# EAGLE board stepper-motor-driver (EAGLE 5.02)
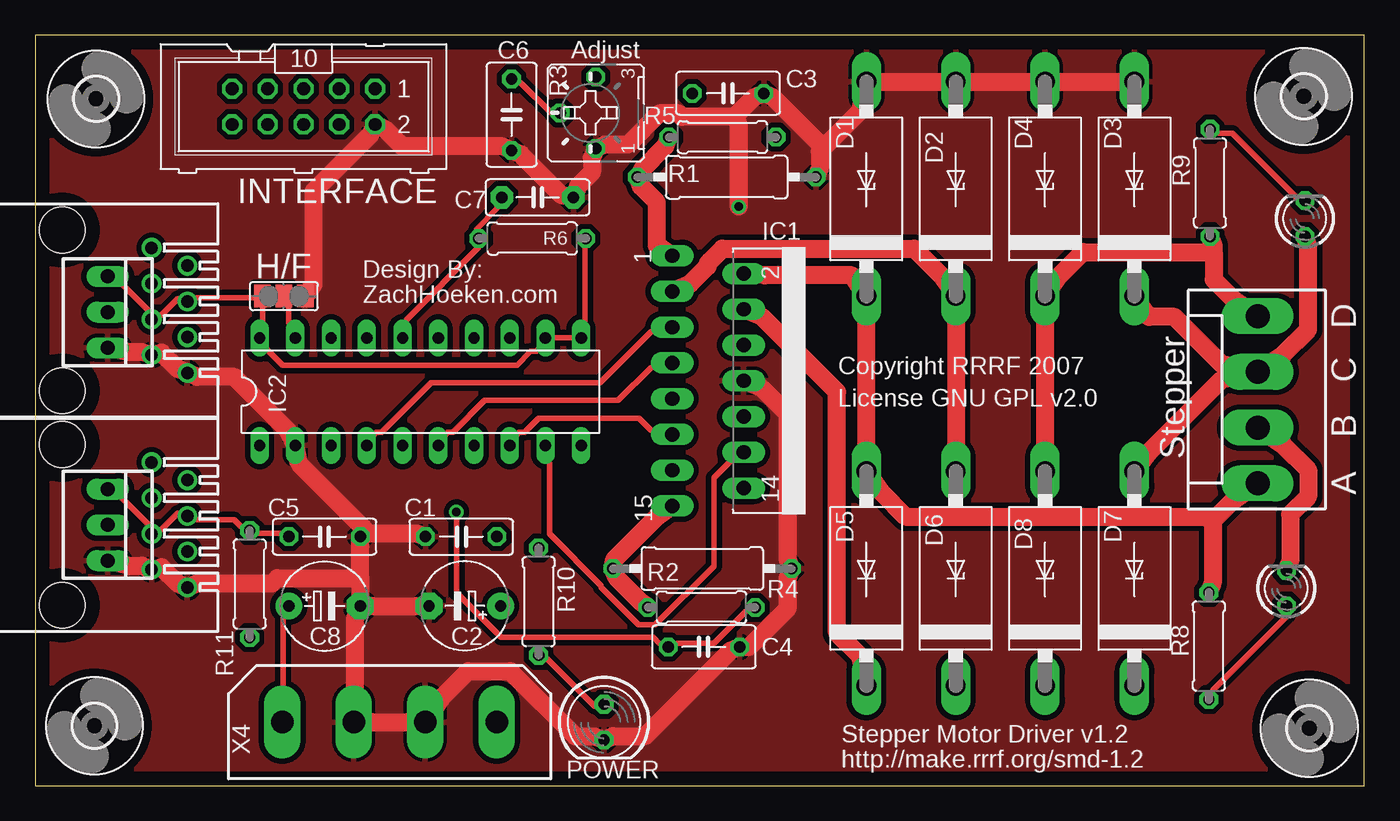
[diagram p0: board, top side]
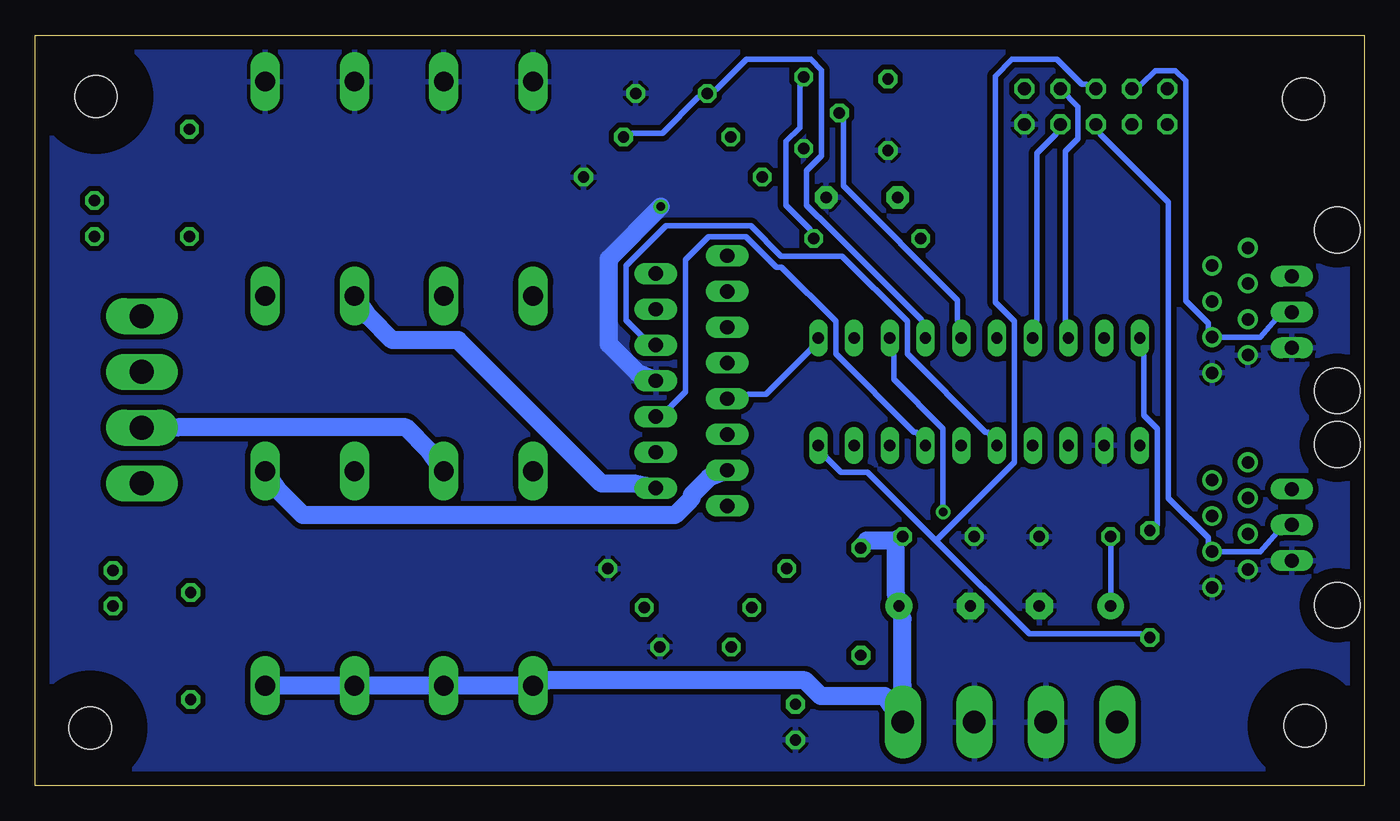
[diagram p1: board, bottom side, seen from below]

Size 94.48 x 53.33 mm. Coordinates in mm from the lower left corner, seen from the top.
Outline: 0,0 94.48,0 94.48,53.33 0,53.33 0,0
Copper layers (1*16): Top 0.035mm / dielectric 1.5mm / Bottom 0.035mm
Design rules "default": minimum track width 10mil, minimum drill 24mil, track to track 8mil, track to pad 8mil, pad to pad 8mil, via to via 8mil, smd to smd 8mil, copper to edge 40mil, drill to drill 8mil, minimum pad ring 10mil, minimum via ring 8mil, stop-mask expansion 4mil, vias tented up to drill 0mil, thermal gap 10mil
Net classes: 0 default: width 0.406 mm, clearance 0.381 mm; 1 Power: width 1.27 mm, clearance 0.381 mm; 2 Signal: width 0.406 mm, clearance 0.381 mm; 3 Ground: width 1.27 mm, clearance 0.381 mm

## Footprints (pad centres in the part's own frame; a part is rotated, then mirrored left to right if it is on the bottom)
C050-025X075 = drill 0.813 octagon: 1 -2.54,0; 2 2.54,0
E5-6 = drill 0.813 pad 1.905 round: + -2.54,0 | drill 0.813 pad 1.905 octagon: - 2.54,0
C050-030X075 = drill 0.813 octagon: 1 -2.54,0; 2 2.54,0
C050-035X075 = drill 0.813 octagon: 1 -2.54,0; 2 2.54,0
C5B2.5 = drill 0.813 pad 1.6 octagon: 1 -2.54,0; 2 2.54,0
CB429-15 = drill 1.397 long: A 7.62,0; C -7.62,0
3,0 = hole 3: 0,0
MULTIWATT-15 = drill 1.016 long: 1 -8.89,-7.62; 2 -7.62,-2.54; 3 -6.35,-7.62; 4 -5.08,-2.54; 5 -3.81,-7.62; 6 -2.54,-2.54; 7 -1.27,-7.62; 8 0,-2.54; 9 1.27,-7.62; 10 2.54,-2.54; 11 3.81,-7.62; 12 5.08,-2.54; 13 6.35,-7.62; 14 7.62,-2.54; 15 8.89,-7.62
DIL20 = drill 0.813 long: 1 -11.43,-3.81; 2 -8.89,-3.81; 3 -6.35,-3.81; 4 -3.81,-3.81; 5 -1.27,-3.81; 6 1.27,-3.81; 7 3.81,-3.81; 8 6.35,-3.81; 9 8.89,-3.81; 10 11.43,-3.81; 11 11.43,3.81; 12 8.89,3.81; 13 6.35,3.81; 14 3.81,3.81; 15 1.27,3.81; 16 -1.27,3.81; 17 -3.81,3.81; 18 -6.35,3.81; 19 -8.89,3.81; 20 -11.43,3.81
520426-4 = drill 0.889 round: 1 -4.445,6.35; 2 -3.175,8.89; 3 -1.905,6.35; 4 -0.635,8.89; 5 0.635,6.35; 6 1.905,8.89; 7 3.175,6.35; 8 4.445,8.89 | hole 3.251: -5.715,0; 5.715,0
LED5MM = drill 0.813 octagon: A -1.27,0; K 1.27,0
LED3MM = drill 0.813 octagon: A -1.27,0; K 1.27,0
0309/12 = drill 0.813 octagon: 1 -6.35,0; 2 6.35,0
B25P = drill 0.813 octagon: A -2.54,0; E 2.54,0; S 0,2.54
0207/7 = drill 0.813 octagon: 1 -3.81,0; 2 3.81,0
SJ_2 = smd 1.168 x 1.6: 1 -1.524,0; 2 0,0; 3 1.524,0
ML10 = drill 0.914 octagon: 1 -5.08,-1.27; 2 -5.08,1.27; 3 -2.54,-1.27; 4 -2.54,1.27; 5 0,-1.27; 6 0,1.27; 7 2.54,-1.27; 8 2.54,1.27; 9 5.08,-1.27; 10 5.08,1.27
KK-156-4 = drill 1.7 pad 2.184 long: 1 -5.94,0; 2 -1.98,0; 3 1.98,0; 4 5.94,0
22-23-2031 = drill 1 long: 1 -2.54,0; 2 0,0; 3 2.54,0
9090-4V = drill 1.6 pad 2.6 long: 1 -7.62,0; 2 -2.54,0; 3 2.54,0; 4 7.62,0

## Placement (x,y rotation side)
C1  100nf  [C050-025X075]  30.28,17.7 0 top
C2  100uF  [E5-6]  30.54,12.77 180 top
C3  1nF  [C050-030X075]  49.24,49.2 180 top
C4  1nF  [C050-030X075]  47.53,9.86 180 top
C5  100nf  [C050-025X075]  20.57,17.7 180 top
C6  100nf  [C050-035X075]  33.86,47.68 270 top
C7  3.3 nF  [C5B2.5]  35.71,41.81 0 top
C8  100uF  [E5-6]  20.57,12.77 0 top
D1  SB360  [CB429-15]  59.08,42.41 90 top
D2  SB360  [CB429-15]  65.43,42.41 90 top
D3  SB360  [CB429-15]  78.13,42.41 90 top
D4  SB360  [CB429-15]  71.78,42.41 90 top
D5  SB360  [CB429-15]  59.08,14.73 90 top
D6  SB360  [CB429-15]  65.43,14.73 90 top
D7  SB360  [CB429-15]  78.13,14.73 90 top
D8  SB360  [CB429-15]  71.78,14.73 90 top
H1  MOUNT-HOLE3.0  [3,0]  90.56,4.09 0 top
H2  MOUNT-HOLE3.0  [3,0]  90.16,48.98 0 top
H3  MOUNT-HOLE3.0  [3,0]  4.22,4.27 0 top
H4  MOUNT-HOLE3.0  [3,0]  4.33,48.8 0 top
IC1  L298  [MULTIWATT-15]  52.89,28.77 270 top
IC2  L297  [DIL20]  27.38,28 0 top
J1  [520426-4]  1.93,33.78 270 top
J2  [520426-4]  1.93,18.54 270 top
LED1  [LED5MM]  40.44,4.52 270 top
LED2  [LED3MM]  88.93,14.03 90 top
LED3  [LED3MM]  90.25,40.3 90 top
R1  0.5  [0309/12]  49.15,43.25 180 top
R2  0.5  [0309/12]  47.42,15.44 180 top
R3  10K  [B25P]  39.85,47.81 90 top
R4  4K7  [0207/7]  47.36,12.67 0 top
R5  4K7  [0207/7]  48.85,46.09 180 top
R6  22K  [0207/7]  35.33,38.89 0 top
R8  560  [0207/7]  83.42,9.93 270 top
R9  560  [0207/7]  83.5,42.84 270 top
R10  560  [0207/7]  35.78,13.08 90 top
R11  100K  [0207/7]  15.25,14.34 270 top
SJ1  [SJ_2]  17.68,34.79 0 top
SV1  [ML10]  19.07,48.25 180 top
X1  [KK-156-4]  86.89,27.43 90 top
X2  Minimum  [22-23-2031]  5.15,18.54 270 top
X3  Maximum  [22-23-2031]  5.15,33.65 270 top
X4  9090-4V  [9090-4V]  25.19,4.52 0 top

## Library data of the parts
C1-C6 C8 R1 R2 R4-R6 R8-R11 = rcl
C7 = capacitor-wima
D1-D8 = diode
H1-H4 = holes
IC1 IC2 = st-microelectronics
J1 J2 = con-amp
LED1-LED3 = led
R3 = pot
SJ1 = jumper
SV1 = con-harting-ml
X1-X3 = con-molex
X4 = con-thomas-betts

## Nets
DIR: IC2.17 SV1.4
ENABLE: IC2.10 R11.2 SV1.5
GND [Ground]: C1.1 C2.- C3.1 C4.1 C5.1 C6.2 C7.2 C8.- D1.A D2.A D3.A D4.A IC1.8 IC2.2 J1.7 J1.8 J2.7 J2.8 LED1.K R1.1 R2.1 R3.A SJ1.3 SV1.2 X2.3 X3.3 X4.2 X4.3
MAX: J1.6 SV1.7 X3.2
MIN: J2.6 SV1.6 X2.2
N$1: IC2.19 SJ1.2
N$2: LED3.K R9.1
N$3: LED2.A R8.2
N$4: LED1.A R10.1
N$25: IC1.5 IC2.4
N$26: IC1.7 IC2.6
N$27 [Power]: D4.C D8.A IC1.14 R9.2 X1.4
N$28 [Power]: D3.C D7.A IC1.13 LED3.A X1.3
N$29 [Power]: D2.C D6.A IC1.3 LED2.K X1.2
N$30 [Power]: D1.C D5.A IC1.2 R8.1 X1.1
N$31: IC1.10 IC2.7
N$32 [Power]: IC1.15 R2.2 R4.1
N$33 [Power]: IC1.1 R1.2 R5.2
N$34: IC1.12 IC2.9
N$36: C4.2 IC2.13 R4.2
N$37: C3.2 IC2.14 R5.1
ON_A: IC1.6 IC2.5
ON_B: IC1.11 IC2.8
OSC: C7.1 IC2.16 R6.1
STEP: IC2.18 SV1.3
SYNC: IC2.1
VCC: C5.2 C8.+ IC1.9 IC2.11 IC2.12 IC2.20 J1.4 J1.5 J2.4 J2.5 R3.E R6.2 R11.1 SJ1.1 X2.1 X3.1 X4.1
VREF: C6.1 IC2.15 R3.S
VSS [Power]: C1.2 C2.+ D5.C D6.C D7.C D8.C IC1.4 R10.2 X4.4

## Tracks (layer width: path | path; a pad name or v marks a point on that pad's centre or on a via)
DIR
  Bottom 0.406: IC2.17 23.29,33.12 23.29,44.93 21.92,46.3 SV1.4
ENABLE
  Bottom 0.406: 30.44,17.41 35.31,22.27 37.21,22.27 38.18,23.24 IC2.10 | 30.44,17.41 23.82,10.79 15.9,10.79 R11.2 | SV1.5 19.76,49.83 20.07,49.83 21.84,51.61 25.04,51.61 26.24,50.41 26.24,34.36 24.87,32.99 24.87,22.98 30.44,17.41
GND  (via drill 0.61)
  Top 1.27: SJ1.3 19.76,35.58 19.76,42.21 23.85,46.3 SV1.2 24.84,46.68 26.09,45.44 33.22,45.44 C6.2 34.52,44.88 37.46,41.93 C7.2 38.58,42.59 39.57,43.58 39.57,44.62 R3.A 40.49,45.56 42.14,45.56 44.35,47.77 45.74,47.77 46,47.52 49.71,47.52 | 56.02,45.32 58.65,47.95 D1.A D2.A D4.A D3.A | 56.02,45.32 55.78,45.08 55.78,43.89 R1.1 | 56.02,45.32 52.42,48.91 C3.1 51.13,48.94 49.71,47.52 | IC1.8 51.66,28.24 53.49,26.41 53.49,16.07 R2.1 53.49,14.78 53.49,12.62 50.72,9.85 C4.1 49.43,9.6 43.36,3.53 41.07,3.53 LED1.K 39.78,3.5 38.4,3.5 33.76,8.15 30.78,8.15 29.01,6.37 X4.3 26.44,4.52 23.93,4.52 X4.2 22.71,7.11 22.71,11.83 C8.- | X2.3 6.6,15.64 7.59,15.64 J2.7 8.97,15.54 10.13,14.37 J2.8 11.51,14.37 16.84,14.37 17.22,14.75 23.11,14.75 | X3.3 6.65,30.8 7.59,30.8 J1.7 8.97,30.78 10.13,29.61 J1.8 11.51,29.05 14.15,29.05 17.96,25.24 IC2.2 18.77,22.88 23.32,18.33 23.25,18.12 | 23.11,14.75 23.11,13.71 C8.- | 23.11,14.75 23.11,17.04 C5.1 23.25,18.12 | C1.1 27.1,17.93 23.85,17.93 23.25,18.12 | C2.- 27.05,12.77 24.05,12.77 C8.- | v50.01,41.14 50.01,46.96 49.71,47.52
  Bottom 1.27: v50.01,41.14 53.7,37.46 53.7,31.36 51.64,29.31 IC1.8
  pour Top: -1.88,55.88 97.18,55.88 97.18,-2.55 -1.88,-2.55
  pour Bottom: -1.88,55.88 97.18,55.88 97.18,-2.55 -1.88,-2.55
MAX
  Bottom 0.406: SV1.7 15.85,49.83 14.86,50.82 13.44,50.82 12.7,50.08 12.7,34.46 11.1,32.86 11.1,32.56 J1.6 7.39,31.87 5.87,33.65 X3.2
MIN
  Bottom 0.406: SV1.6 18.77,46.3 13.92,41.45 13.92,20.44 11.1,17.62 11.1,17.32 J2.6 10.82,16.5 10.44,16.63 7.39,16.63 5.74,18.54 X2.2
N$1
  Top 0.406: SJ1.2 18.03,34.01 18.03,32.94 IC2.19
N$2
  Top 0.406: R9.1 84.15,46.38 85.09,46.38 89.61,41.85 LED3.K
N$3
  Top 0.406: R8.2 83.69,6.78 89.03,12.11 LED2.A
N$4
  Top 0.406: R10.1 36.42,8.99 39.78,5.63 LED1.A
N$25
  Top 0.406: IC2.4 24.23,25.12 24.61,25.12 28.14,28.65 40.16,28.65 43.76,32.25 IC1.5
N$26
  Top 0.406: IC2.6 29.31,25.12 29.69,25.12 31.95,27.38 41.43,27.38 43.76,29.71 IC1.7
N$27
  Top 1.27: 83.77,37.92 83.77,35.96 85.09,34.64 X1.4 | 83.77,37.92 83.77,38.37 R9.2 | D8.A D4.C 72.82,36.27 74.47,37.92 83.77,37.92
  Bottom 1.27: IC1.14 51.87,21.46 54.2,21.46 64.41,31.67 69.09,31.67 70.74,33.32 D4.C
N$28
  Top 1.27: LED3.A 90.47,38.37 90.47,32.41 88.72,30.65 X1.3 | D3.C 79.17,33.32 80.98,33.32 84.35,29.94 X1.3 | X1.3 84.35,28.88 79.17,23.69 D7.A
  Bottom 1.27: IC1.13 46.58,21.89 47.8,20.67 47.8,20.44 47.95,20.29 47.95,20.26 49,19.22 75.44,19.22 77.09,20.87 D7.A
N$29
  Top 1.27: LED2.K 89.2,15.95 89.2,19.27 90.47,20.54 90.47,22.45 88.72,24.2 X1.2 | IC1.3 46.56,35.66 47.8,36.9 47.8,37.1 47.95,37.26 47.95,37.28 48.84,38.17 62.48,38.17 64.39,36.27 D2.C D6.A
  Bottom 1.27: X1.2 84.35,25.47 68.12,25.47 66.47,23.82 D6.A
N$30
  Top 1.27: 83.69,18.82 83.69,14.4 R8.1 | 83.69,18.82 85.09,20.21 X1.1 | IC1.2 51.87,36.27 58.04,36.27 D1.C D5.A 60.12,20.87 61.87,19.12 83.13,19.12 83.69,18.82
N$31
  Bottom 0.406: IC2.7 31.85,25.12 32,25.12 37.57,30.68 37.57,32.99 41.43,36.85 41.78,36.85 43.94,39.01 46.61,39.01 48.23,37.38 48.23,28.01 49.28,26.97 IC1.10
N$32
  Top 1.27: R4.1 43.03,13.08 41.32,14.78 R2.2 41.15,16.07 44.2,19.12 IC1.15
N$33
  Top 1.27: R5.2 44.78,45.44 43.15,43.81 R1.2 43.05,42.59 44.2,41.45 44.2,38.4 IC1.1
N$34
  Top 0.406: IC2.9 36.55,22.88 36.55,17.9 40.23,14.22 40.23,14.09 42.9,11.42 44.07,11.42 48.23,15.59 48.23,21.89 49.28,22.93 IC1.12
N$36  (via drill 0.61)
  Top 0.406: R4.2 50.52,12.42 48.23,10.13 45.64,10.13 C4.2 44.35,10.13 43.94,10.54 33.12,10.54 29.95,13.71 v29.95,19.45
  Bottom 0.406: v29.95,19.45 29.95,25.37 33.45,28.88 33.45,30.5 IC2.13
N$37
  Bottom 0.406: IC2.14 31.47,33.12 38.76,40.41 38.81,40.41 39.65,41.25 39.65,43.71 38.58,44.78 38.58,50.85 39.34,51.61 43.92,51.61 46.05,49.47 C3.2 47.34,48.91 49.88,46.38 52.02,46.38 R5.1
ON_A
  Bottom 0.406: IC2.5 26.77,25.12 26.92,25.12 32.49,30.68 32.49,32.99 37.13,37.64 41.45,37.64 43.61,39.8 49.63,39.8 52.48,36.95 52.48,33.09 51.44,32.05 IC1.6
ON_B
  Top 0.406: IC2.8 34.39,25.12 34.77,25.12 35.76,26.11 42.93,26.11 43.76,25.27 IC1.11
OSC
  Top 0.406: IC2.16 26.39,33.12 31.52,38.25 R6.1 31.37,39.54 32.84,41.02 C7.1
STEP
  Bottom 0.406: IC2.18 21.23,31.81 21.23,45.08 20.34,45.97 20.34,48.25 SV1.3
VCC
  Top 0.406: R6.2 39.09,38.25 39.09,33.12 IC2.11 38.18,31.82 36.93,31.82 IC2.12 35.64,30.86 35.2,30.86 34.24,29.89 17.6,29.89 16.61,30.88 IC2.20 16.15,33.12 SJ1.1 15.59,34.69 11.51,34.69 J1.4 10.13,34.59 8.97,33.42 J1.5 8,33.83 6.3,35.53 X3.1 | X2.1 6.25,20.37 8.03,18.59 J2.5 8.97,18.18 10.13,19.35 J2.4 11.51,18.89 14.15,18.89 14.61,18.44 R11.1 15.9,17.95 17.37,17.95 C5.2 | X4.1 17.63,7.11 17.63,11.83 C8.+
  Bottom 0.406: R3.E 40.13,49.7 40.13,46.76 41.1,45.79 41.1,41.25 39.39,39.54 R6.2 | IC1.9 43.76,27.81 42.55,27.81 39.47,30.88 IC2.11 | C5.2 18.03,17.04 18.03,13.71 C8.+ | IC2.20 15.67,30.5 15.67,26.34 14.71,25.37 14.71,18.54 R11.1
VREF
  Top 0.406: C6.1 34.52,49.96 36.65,47.82 R3.S
  Bottom 0.406: IC2.15 28.93,33.12 28.93,34.51 37.03,42.62 37.03,47.16 R3.S
VSS
  Top 1.27: IC1.4 51.66,33.32 57,27.99 57,10.84 58.65,9.19 D5.C
  Bottom 1.27: 33.48,17.42 35.38,17.42 R10.2 | 33.48,17.42 C1.2 | 33.48,17.42 33.3,16.81 33.3,13.71 C2.+ 32.82,11.83 32.82,7.11 X4.4 34.09,6.37 38.63,6.37 39.75,7.49 58.04,7.49 D5.C D6.C D8.C D7.C

## Text on the board
tPlace: Adjust | INTERFACE | H/F | Design By: | ZachHoeken.com | D | C | Copyright RRRF 2007 | License GNU GPL v2.0 | B | Stepper | A | Stepper Motor Driver v1.2 | http://make.rrrf.org/smd-1.2 | POWER